# EAGLE board PCB-TCH-CON (EAGLE 6.4)
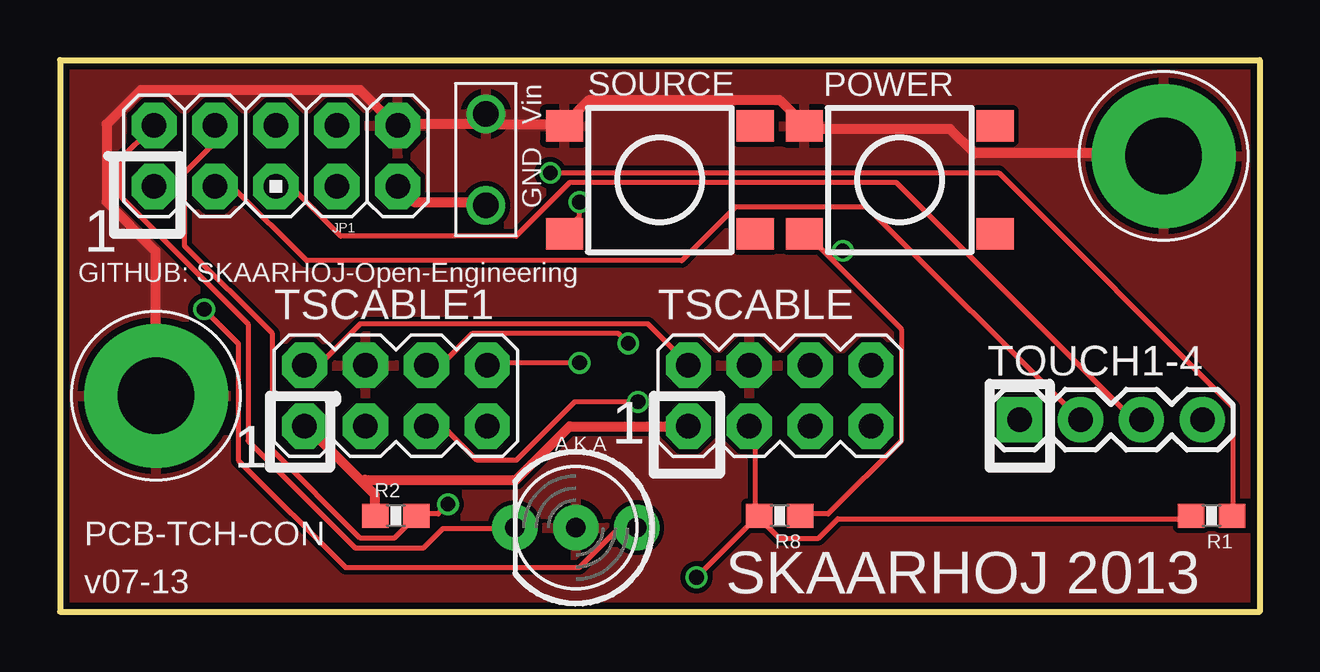
[diagram p0: board, top side]
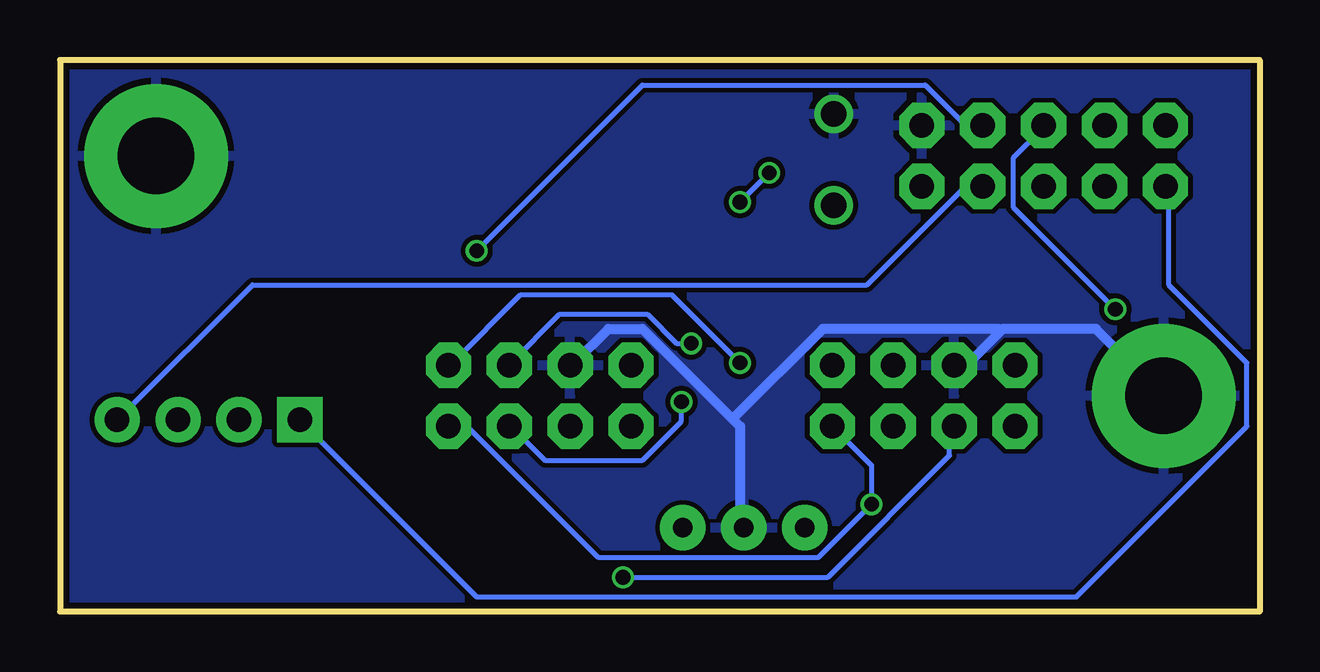
[diagram p1: board, bottom side, seen from below]

Size 50 x 23 mm. Coordinates in mm from the lower left corner, seen from the top.
Outline: 0,23 50,23 50,0 0,0 0,23
Copper layers (1*16): Top 0.035mm / dielectric 1.5mm / Bottom 0.035mm
Design rules "Fusion_eagle_rule_v1.1": minimum track width 6mil, minimum drill 12mil, track to track 6mil, track to pad 6mil, pad to pad 6mil, via to via 6mil, smd to smd 0mil, copper to edge 10mil, drill to drill 10mil, minimum pad ring 10mil, minimum via ring 6mil, stop-mask expansion 2mil, vias tented up to drill 100mil, thermal gap 10mil
Net classes: 0 default: width 0.203 mm, drill 0.61 mm, clearance 0.203 mm; 1 Power: width 0.406 mm, drill 0.61 mm, clearance 0.203 mm

## Footprints (pad centres in the part's own frame; a part is rotated, then mirrored left to right if it is on the bottom)
AVR_ICSP = drill 1.016 pad 1.88 octagon: 1 -1.27,5.08; 2 1.27,5.08; 3 -1.27,2.54; 4 1.27,2.54; 5 -1.27,0; 6 1.27,0; 7 -1.27,-2.54; 8 1.27,-2.54; 9 -1.27,-5.08; 10 1.27,-5.08
TACTILE_SWITCH_TALL = smd 1.55 x 1.3: A1 -3.975,-2.25; A2 3.975,-2.25; B1 -3.975,2.25; B2 3.975,2.25
0603-RES = smd 1.1 x 1: 1 -0.85,0; 2 0.85,0
1X04 = drill 1.016 pad 1.88 square: 1 0,0 | drill 1.016 pad 1.88: 2 2.54,0; 3 5.08,0; 4 7.62,0
2X4 = drill 1.016 pad 1.88 octagon: 1 -3.81,-1.27; 2 -3.81,1.27; 3 -1.27,-1.27; 4 -1.27,1.27; 5 1.27,-1.27; 6 1.27,1.27; 7 3.81,-1.27; 8 3.81,1.27
LED5MM-BICOLOR = drill 0.813 pad 1.88: A2 2.54,0; A3 -2.54,0; K1 0,0
3.2MMPAD6MM = drill 3.2 pad 6: P$1 0,0
1X02_BIG = drill 1.067: P$1 0,0; P$2 3.81,0

## Placement (x,y rotation side)
JP1  M05X2PTH  [AVR_ICSP]  9,19 90 top
ON  SWITCH-MOMENTARY-2  [TACTILE_SWITCH_TALL]  35,18 180 top
R1  100R  [0603-RES]  48,4 180 top
R2  1K  [0603-RES]  14,4 0 top
R8  15K  [0603-RES]  30,4 180 top
SRC  SWITCH-MOMENTARY-2  [TACTILE_SWITCH_TALL]  25,18 180 top
TOUCH1-4  [1X04]  40,8 0 top
TSCABLE  M04X2  [2X4]  30,9 0 top
TSCABLE1  M04X2  [2X4]  14,9 0 top
U$2  LEDBICOLOR-AKA  [LED5MM-BICOLOR]  21.5,3.5 180 top
U$15  GNDPAD6MM  [3.2MMPAD6MM]  4,9 0 top
U$20  GNDPAD6MM  [3.2MMPAD6MM]  46,19 0 top
VIN1  [1X02_BIG]  17.75,20.75 270 top

## Library data of the parts
JP1 ON R1 R2 R8 SRC TOUCH1-4 TSCABLE TSCABLE1 VIN1 = SparkFun
U$2 U$15 U$20 = SKAARHOJ

## Nets
5V [Power]: R2.1 TSCABLE1.1 TSCABLE.1
A0: JP1.1 TOUCH1-4.1
A1: JP1.3 TOUCH1-4.2
A2: JP1.5 TOUCH1-4.3
A3: JP1.7 TOUCH1-4.4
GND [Power]: JP1.10 ON.A2 SRC.A2 TSCABLE1.4 TSCABLE.4 U$2.K1 U$15.P$1 U$20.P$1 VIN1.P$1
IR: TSCABLE1.2 TSCABLE.2
KEYIN: R1.2 R8.2 TSCABLE1.3 TSCABLE.3
LEDPWR: TSCABLE1.5 TSCABLE.5
N$1: JP1.2 U$2.A2
N$2: JP1.6 U$2.A3
N$4: TSCABLE1.8 TSCABLE.8
N$6: R1.1 SRC.B2
N$11: JP1.8 ON.B2 R8.1
PWRLED1: TSCABLE1.6 TSCABLE.6
PWRLED2: JP1.4 R2.2 TSCABLE1.7 TSCABLE.7
VIN [Power]: JP1.9 VIN1.P$2

## Tracks (layer width: path | path; a pad name or v marks a point on that pad's centre or on a via)
5V
  Top 0.406: 12.61,5.39 10.28,7.73 TSCABLE1.1 | 12.61,5.39 13.12,4.88 13.12,4.07 R2.1 | TSCABLE.1 26.13,7.73 21.25,7.73 19.01,5.49 12.71,5.49 12.61,5.39
A0
  Bottom 0.203: JP1.1 3.77,17.68 3.77,13.62 0.52,10.37 0.52,7.73 7.63,0.61 32.63,0.61 39.94,7.93 TOUCH1-4.1
A1
  Top 0.203: JP1.3 6.62,17.68 7.23,17.68 10.28,14.63 25.92,14.63 28.16,16.87 33.65,16.87 42.38,8.13 TOUCH1-4.2
A2
  Top 0.203: JP1.5 9.06,17.68 9.67,17.68 11.7,15.65 19.01,15.65 21.25,17.89 34.86,17.89 44.62,8.13 45.02,8.13 TOUCH1-4.3
A3
  Bottom 0.203: JP1.7 11.7,17.68 12.31,17.68 16.37,13.62 41.98,13.62 47.46,8.13 TOUCH1-4.4
GND
  Top 0.406: U$20.P$1 45.84,19.11 38.12,19.11 37.1,20.12 31.21,20.12 ON.A2 31,20.32 29.99,21.34 22.06,21.34 21.05,20.32 SRC.A2 20.84,20.32 18.2,20.32 17.8,20.73 VIN1.P$1 18,20.32 14.14,20.32 JP1.10 13.93,20.32 12.51,21.75 3.37,21.75 1.95,20.32 1.95,17.07 3.98,15.04 3.98,9.15 U$15.P$1
  Bottom 0.406: 21.96,8.03 25.72,11.79 27.14,11.79 28.57,10.37 TSCABLE.4 | 21.96,8.03 21.66,7.73 21.66,3.66 U$2.K1 | 10.79,11.69 10.68,11.79 6.82,11.79 4.18,9.15 U$15.P$1 | 10.79,11.69 12.11,10.37 12.71,10.37 TSCABLE1.4 | 21.96,8.03 18.2,11.79 10.89,11.79 10.79,11.69
  pour Top: 0,0 50,0 50,23 0,23
  pour Bottom: 0,0 50,0 50,23 0,23
IR
  Top 0.203: TSCABLE1.2 10.28,10.37 10.89,10.37 12.51,11.99 24.5,11.99 26.13,10.37 TSCABLE.2
KEYIN  (via drill 0.61)
  Top 0.203: R8.2 28.97,4.07 28.97,7.52 28.77,7.73 TSCABLE.3 | R1.2 47.06,3.87 32.43,3.87 31.61,3.05 29.99,3.05 29.17,3.87 R8.2 | v26.53,1.43 28.97,3.87 R8.2
  Bottom 0.203: v26.53,1.43 18,1.43 12.92,6.51 12.92,7.73 TSCABLE1.3
LEDPWR  (via drill 0.61)
  Top 0.203: v24.09,8.74 21.45,8.74 19.01,6.3 17.39,6.3 15.97,7.73 15.36,7.73 TSCABLE1.5
  Bottom 0.203: v24.09,8.74 24.09,7.93 25.72,6.3 29.78,6.3 31.21,7.73 TSCABLE.5
N$1
  Top 0.203: U$2.A2 18.81,3.46 15.97,3.46 15.15,2.65 12.31,2.65 7.84,7.12 7.84,11.99 2.56,17.28 2.56,18.9 3.77,20.12 JP1.2
N$2  (via drill 0.61)
  Top 0.203: v6.01,12.6 7.43,11.18 7.43,6.3 11.9,1.83 21.66,1.83 23.28,3.46 23.89,3.46 U$2.A3
  Bottom 0.203: v6.01,12.6 10.28,16.87 10.28,18.9 9.06,20.12 JP1.6
N$4  (via drill 0.61)
  Top 0.203: v21.66,10.37 18,10.37 TSCABLE1.8
  Bottom 0.203: v21.66,10.37 24.5,13.21 30.8,13.21 33.65,10.37 TSCABLE.8
N$6  (via drill 0.61)
  Top 0.203: v20.44,18.29 39.13,18.29 48.88,8.54 48.88,4.07 R1.1 | v21.66,17.07 21.66,16.46 21.05,15.85 SRC.B2
  Bottom 0.203: v21.66,17.07 v20.44,18.29
N$11  (via drill 0.61)
  Top 0.203: 32.22,14.63 31.21,15.65 ON.B2 | 32.22,14.63 35.07,11.79 35.07,7.12 32.02,4.07 31,4.07 R8.1 | 32.22,14.63 v32.63,15.04
  Bottom 0.203: v32.63,15.04 25.72,21.95 13.93,21.95 12.31,20.32 11.7,20.32 JP1.8
PWRLED1  (via drill 0.61)
  Top 0.203: v23.69,11.18 23.28,11.59 17.19,11.59 15.97,10.37 15.36,10.37 TSCABLE1.6
  Bottom 0.203: v23.69,11.18 24.3,11.18 25.52,12.4 29.17,12.4 31.21,10.37 TSCABLE.6
PWRLED2  (via drill 0.61)
  Top 0.203: v16.17,4.47 15.76,4.07 14.95,4.07 R2.2 14.75,3.87 13.93,3.05 12.51,3.05 8.85,6.71 8.85,11.59 5.2,15.24 5.2,18.29 6.42,19.51 6.42,20.12 JP1.4
  Bottom 0.203: TSCABLE1.7 17.8,7.73 16.17,6.1 v16.17,4.47 18.41,2.24 27.55,2.24 33.03,7.73 33.65,7.73 TSCABLE.7
VIN
  Top 0.406: VIN1.P$2 17.59,17.07 14.75,17.07 14.14,17.68 JP1.9

## Text on the board
_tsilk: GND Vin | SOURCE | POWER | 1 | GITHUB: SKAARHOJ-Open-Engineering | 1 | 1 | PCB-TCH-CON | v07-13 | SKAARHOJ 2013